# Altium PCB me老师.PcbDoc
Units mil, origin at the board's own origin, x right, y up, seen from the top; angles counter-clockwise.
Board outline 2030 x 2310 mil, 2 copper layers (Top Layer, Bottom Layer); 17 components, 16 nets, 67 pads, 0 vias.
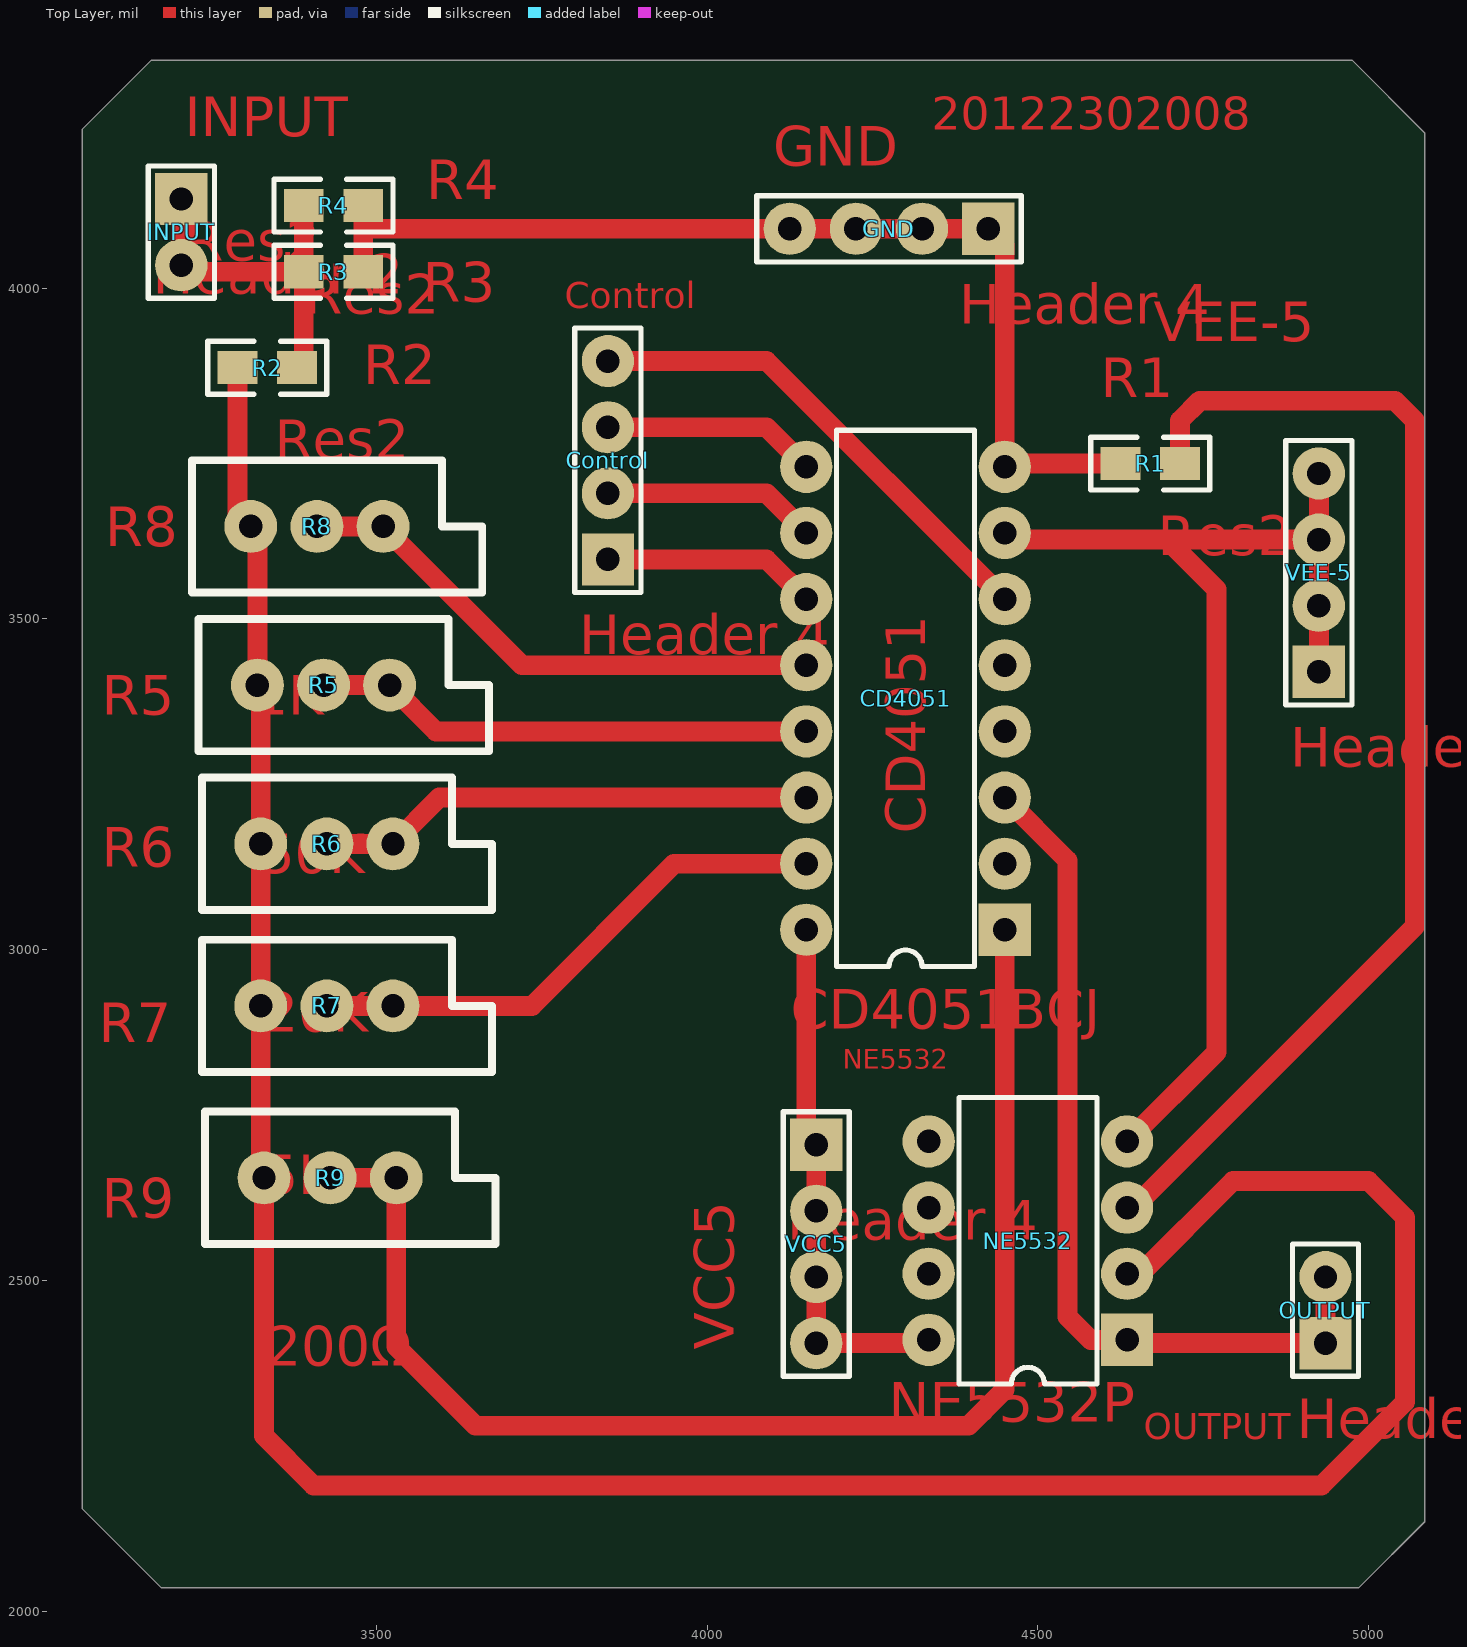
[diagram p0: Top Layer view]
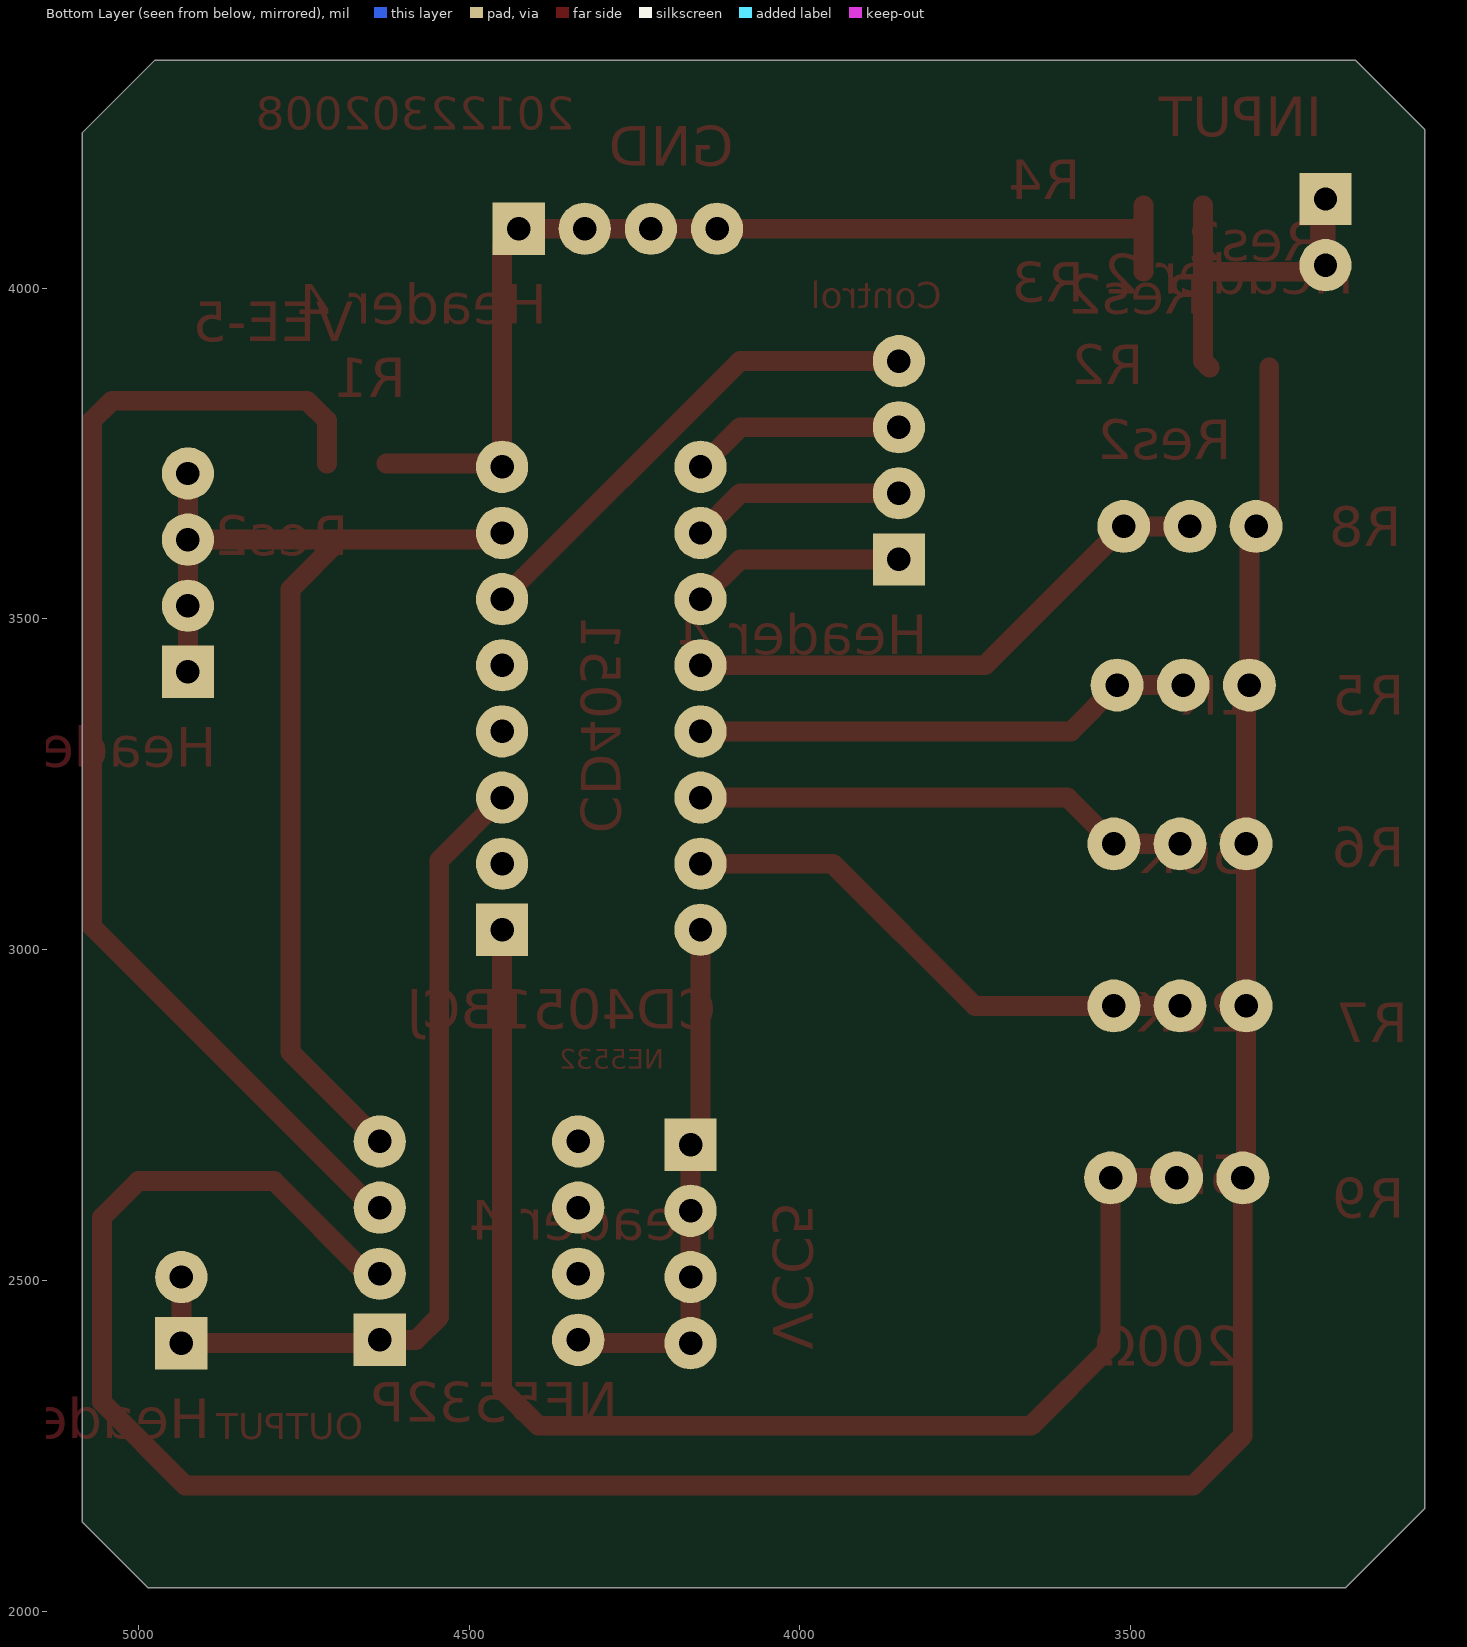
[diagram p1: Bottom Layer view, seen from below]

## Layer stack, top to bottom
Top Layer: signal copper 1.4
Dielectric: dielectric 12.6, FR-4, Dk 4.8
Bottom Layer: signal copper 1.4

## Board outline
3055,2155 3055,4240 3160,4345 4975,4345 5085,4235 5085,2135 4985,2035 3175,2035

## Design rules (kind name [scope] priority, off if disabled: settings)
Clearance [All] p1: gap=15
FabricationTestPointUsage TestPointUsage [All] p1: valid=0 allowmultiple=FALSE
FabricationTestpoint Testpoint [All] p1: side=3 testpointundercomponent=TRUE minsize=40 maxsize=100 preferedsize=60 minholesize=0 maxholesize=40 preferedholesize=32 testpointgrid=1 allowsidetop=TRUE allowsidebottom=TRUE usegrid=TRUE gridtolerance=0.01
PolygonConnect [All] p1: connectstyle=Relief reliefconductorwidth=10 reliefentries=4 polygonreliefangle="90 Angle" airgapwidth=10
RoutingVias [All] p1: holewidth=28 width=50 viastyle="Through Hole" minholewidth=28 minwidth=50 maxholewidth=28 maxwidth=50
SolderMaskExpansion [All] p1: expansion=4
Width [All] p1: maxlimit=40 minlimit=20 preferedwidth=30
26 further rules are at their usual default settings.

## Components (designator, comment, footprint, x,y, rotation, side; value= is the part's Value field where it differs from the comment)
CD4051 "CD4051BCJ" J16A 4300,3380 r90 top (schematic designator U1)
Control "Header 4" HDR1X4 3850,3590 r90 top (schematic designator P4)
GND "Header 4" HDR1X4 4425,4090 r180 top (schematic designator P1)
INPUT "Header 2" HDR1X2 3205,4135 r270 top (schematic designator JP1)
NE5532 "NE5532P" P008 4485,2560 r90 top (schematic designator U2)
OUTPUT "Header 2" HDR1X2 4935,2405 r90 top (schematic designator JP2)
R1 "Res2" 0805 4715,3735 r180 top
R2 "Res2" 0805 3380,3880 r180 top
R3 "Res2" 0805 3480,4025 r180 top
R4 "Res2" 0805 3480,4125 r180 top
R5 "50K" VR5 3420,3400 r0 top
R6 "20K" VR5 3425,3160 r0 top
R7 "5K" VR5 3425,2915 r0 top
R8 "1K" VR5 3410,3640 r0 top
R9 "200Ω" VR5 3430,2655 r0 top
VCC5 "Header 4" HDR1X4 4165,2705 r270 top (schematic designator P3)
VEE-5 "Header 4" HDR1X4 4925,3420 r90 top (schematic designator P2)

## Footprints (in the part's own frame and the unit in brackets; to place one, negate y for a bottom-side part, rotate by r counter-clockwise, add the part's x,y. Pads: shape width x height; smd on the part's side, far side on the other; paste and mask are expansions set on the pad)
0805 [mil]
  rect 60x50 smd: 1(0,0) 2(90,0)
  silkscreen extent -45,-40 135,40
HDR1X2 [mm] "Connector; Header; 2 Position"
  rect 2.008x2.008 hole 0.9: 1(0,0)
  round 2.008 hole 0.9: 2(2.54,0)
  silkscreen extent -1.27,-1.27 3.81,1.27
HDR1X4 [mm] "Connector; Header; 4 Position"
  rect 2.008x2.008 hole 0.9: 1(0,0)
  round 2.008 hole 0.9: 2(2.54,0) 3(5.08,0) 4(7.62,0)
  silkscreen extent -1.27,-1.27 8.89,1.27
J16A [mm] "DIP; 16 Leads; Row Spacing 7.62 mm; Pitch 2.54 mm"
  rect 2.008x2.008 hole 0.9: 1(-8.89,-3.81)
  round 2.008 hole 0.9: 2(-6.35,-3.81) 3(-3.81,-3.81) 4(-1.27,-3.81) 5(1.27,-3.81) 6(3.81,-3.81) 7(6.35,-3.81) 8(8.89,-3.81) 9(8.89,3.81) 10(6.35,3.81) 11(3.81,3.81) 12(1.27,3.81) 13(-1.27,3.81) 14(-3.81,3.81) 15(-6.35,3.81) 16(-8.89,3.81)
  silkscreen extent -10.3,-2.65 10.3,2.65
P008 [mm] "DIP; 8 Leads; Row Spacing 7.62 mm; Pitch 2.54 mm"
  rect 2.008x2.008 hole 0.9: 1(-3.81,-3.81)
  round 2.008 hole 0.9: 2(-1.27,-3.81) 3(1.27,-3.81) 4(3.81,-3.81) 5(3.81,3.81) 6(1.27,3.81) 7(-1.27,3.81) 8(-3.81,3.81)
  silkscreen extent -5.5,-2.65 5.5,2.65
VR5 [mil]
  round 80 hole 35.43 mask+4: 1(-100,0) 2(0,0) 3(100,0)
  silkscreen extent -189,-100 250,100

## Part data
CD4051: "8-Channel Analog Multiplexer/Demultiplexer"
Control GND VCC5 VEE-5: "Header, 4-Pin"
INPUT OUTPUT: "Header, 2-Pin"
NE5532: "Dual Low-Noise Operational Amplifier"
R1 R2 R3 R4: "Resistor"
R5 R6 R7 R8 R9: library part POT2, "Potentiometer"

## Nets (pads, with @x,y where several pads share a name; then routed paths per layer and width w, separated by ;. In a path a pad name is that pad's centre, name@x,y a point inside that pad or via, vN(x,y) a via of type N, cw(c..) or ccw(c..) an arc to the next point about the centre after c; other vN are vias at no path point)
1: CD4051.9 Control.3 | length 324.9
  Top Layer w30: Control.3 4090,3790 CD4051.9
2: CD4051.10 Control.2 | length 324.9
  Top Layer w30: Control.2 4090,3690 CD4051.10
3: CD4051.11 Control.1 | length 324.9
  Top Layer w30: Control.1 4090,3590 CD4051.11
4: CD4051.6 Control.4 | length 749.1
  Top Layer w30: Control.4 4090,3890 CD4051.6
GND: CD4051.8 GND.1 GND.2 GND.3 GND.4 R1.2 R3.1 R4.1 | length 1592.4
  Top Layer w30: R3.1 3480,4090 ; R4.1 3480,4090 ; R1.2 4455,3735 CD4051.8 4450,4065 GND.1 GND.2 GND.3 GND.4 3480,4090
NetJP1_1: INPUT.1 INPUT.2 R2.1 R3.2 R4.2 | length 538.3
  Top Layer w30: INPUT.1 INPUT.2 3215,4025 R3.2 ; R2.1 3390,3890 R3.2 ; R4.2 R3.2
NetJP2_1: CD4051.3 NE5532.1 OUTPUT.1 OUTPUT.2 | length 1330.9
  Top Layer w30: CD4051.3 4545,3135 4545,2445 4580,2410 NE5532.1 4640,2405 OUTPUT.1 OUTPUT.2
NetR1_1: NE5532.3 R1.1 | length 1820.9
  Top Layer w30: NE5532.3 4645,2610 5070,3035 5070,3800 5040,3830 4745,3830 4715,3800 R1.1
NetR2_2: NE5532.2 R2.2 R5.1 R6.1 R7.1 R8.1 R9.1 | length 4219.6
  Top Layer w30: R2.2 3290,3660 R8.1 3320,3630 R5.1 3325,3395 R6.1 R7.1 3325,2660 R9.1 3330,2265 3405,2190 4929,2190 5055,2316 5055,2595 5000,2650 4795,2650 4655,2510 NE5532.2
NetR5_2: CD4051.13 R5.2 R5.3 | length 759
  Top Layer w30: R5.2 R5.3 3590,3330 CD4051.13
NetR6_2: CD4051.14 R6.2 R6.3 | length 754
  Top Layer w30: R6.2 R6.3 3595,3230 CD4051.14
NetR7_2: CD4051.15 R7.2 R7.3 | length 814.1
  Top Layer w30: R7.2 R7.3 3735,2915 3950,3130 CD4051.15
NetR8_2: CD4051.12 R8.2 R8.3 | length 827
  Top Layer w30: R8.2 R8.3 3720,3430 CD4051.12
NetR9_2: CD4051.1 R9.2 R9.3 | length 2042.5
  Top Layer w30: R9.2 R9.3 3530,2400 3650,2280 4395,2280 4450,2335 CD4051.1
VCC+5: CD4051.16 NE5532.8 VCC5.1 VCC5.2 VCC5.3 VCC5.4 | length 803.3
  Top Layer w30: CD4051.16 4150,2720 VCC5.1 VCC5.2 VCC5.3 VCC5.4 4330,2405 NE5532.8
VEE-5: CD4051.7 NE5532.4 VEE-5.1 VEE-5.2 VEE-5.3 VEE-5.4 | length 1776.1
  Top Layer w30: CD4051.7 4460,3620 4695,3620 ; NE5532.4 4770,2845 4770,3545 4695,3620 ; VEE-5.1 VEE-5.2 VEE-5.3 ; VEE-5.4 VEE-5.3 ; 4695,3620 VEE-5.3
pads on no net: CD4051.2 CD4051.4 CD4051.5 NE5532.5 NE5532.6 NE5532.7

## Other copper
Top Layer:
  text "20122302008" at 4340,4240 h50